# EAGLE board MM_MikroBUS_Carrier-Panel (EAGLE 9.4.2), part 1 of 2
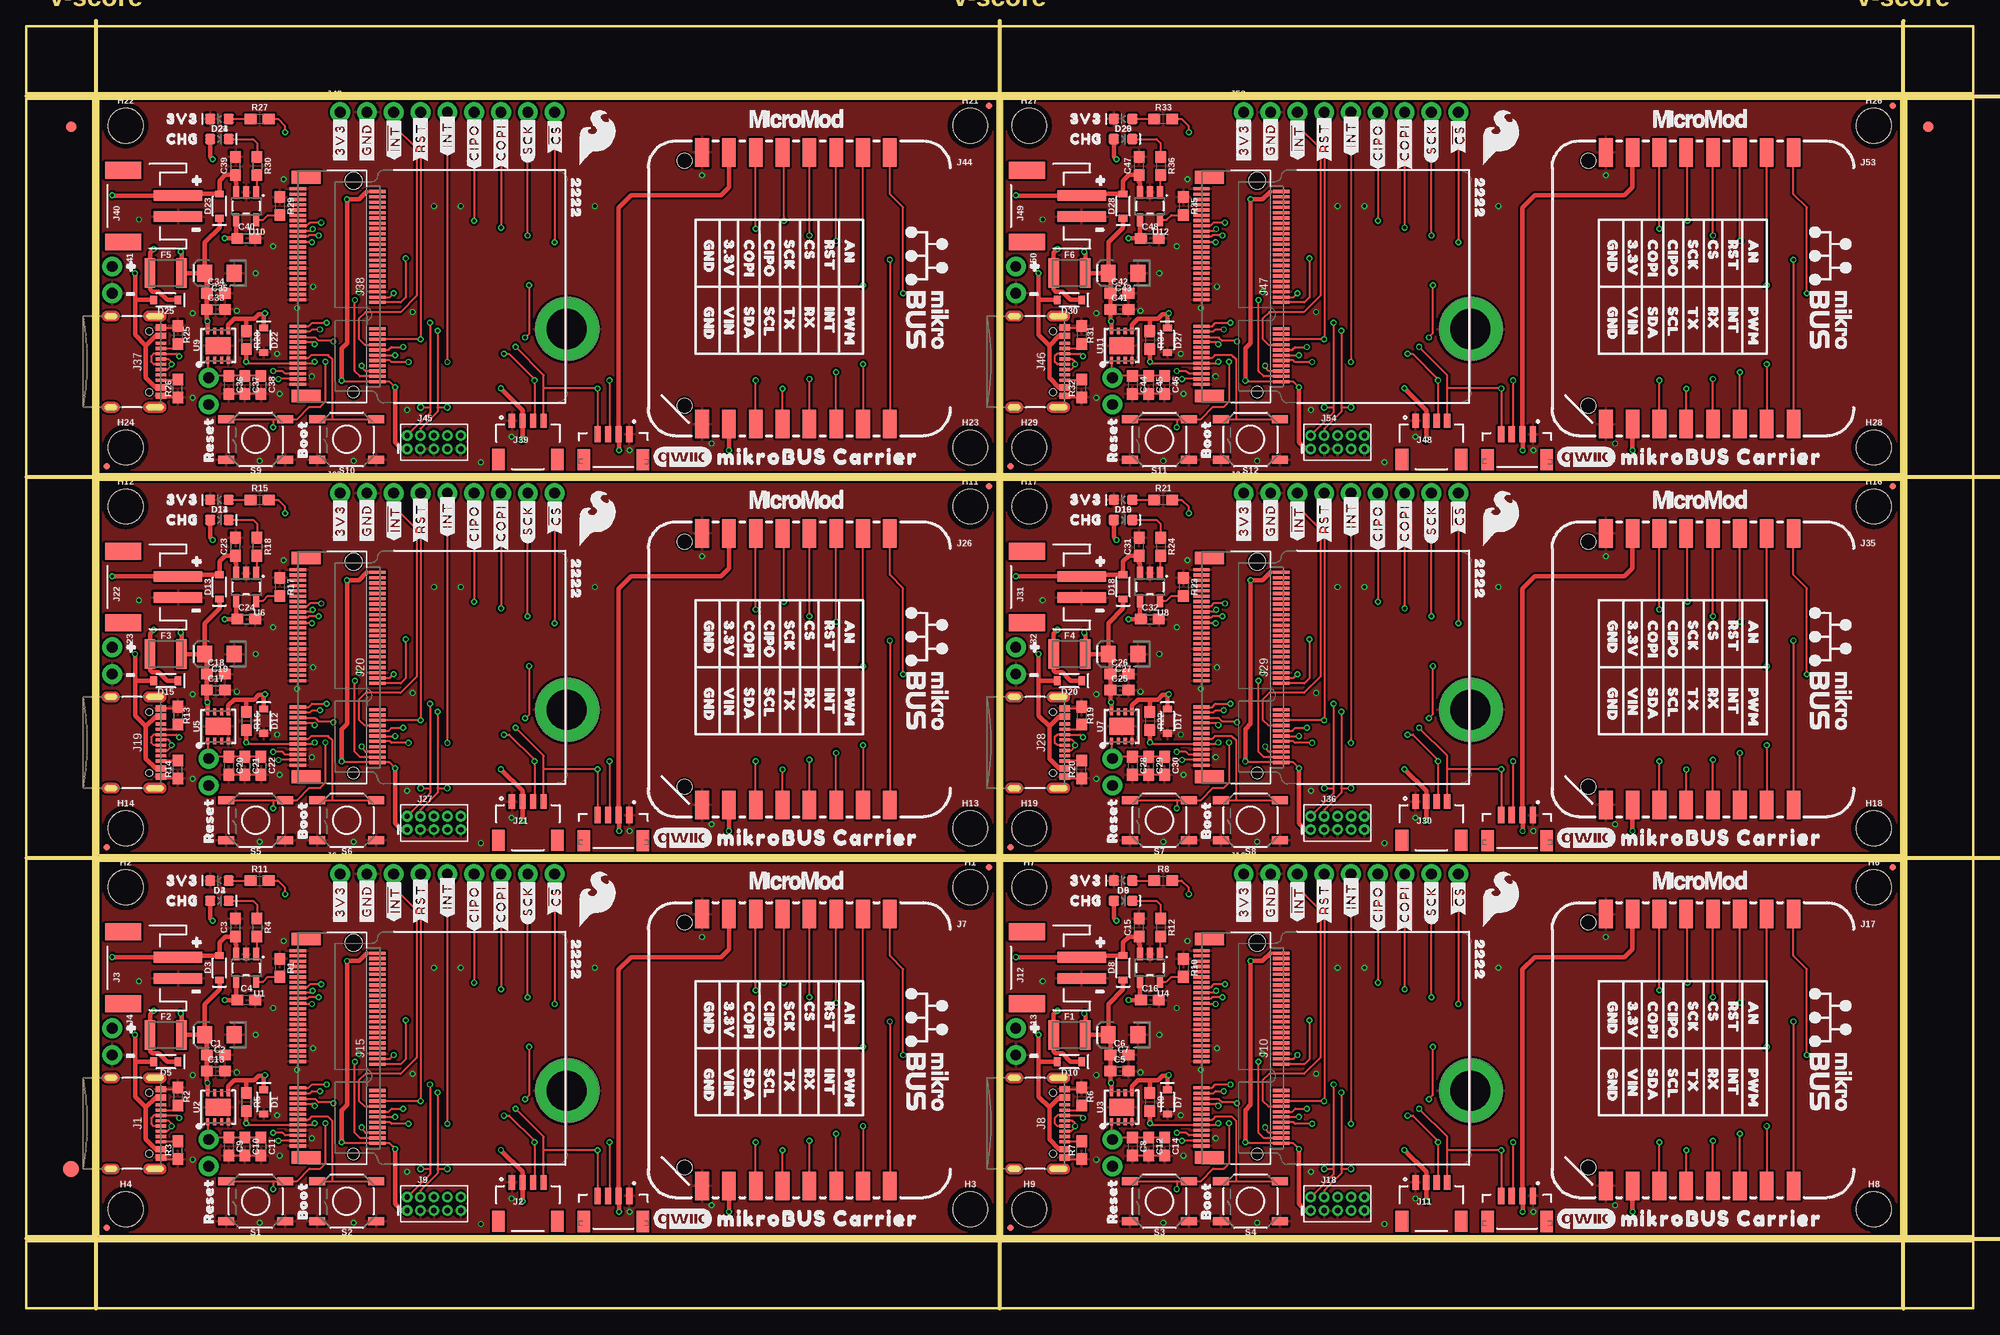
[diagram p0: board, top side]
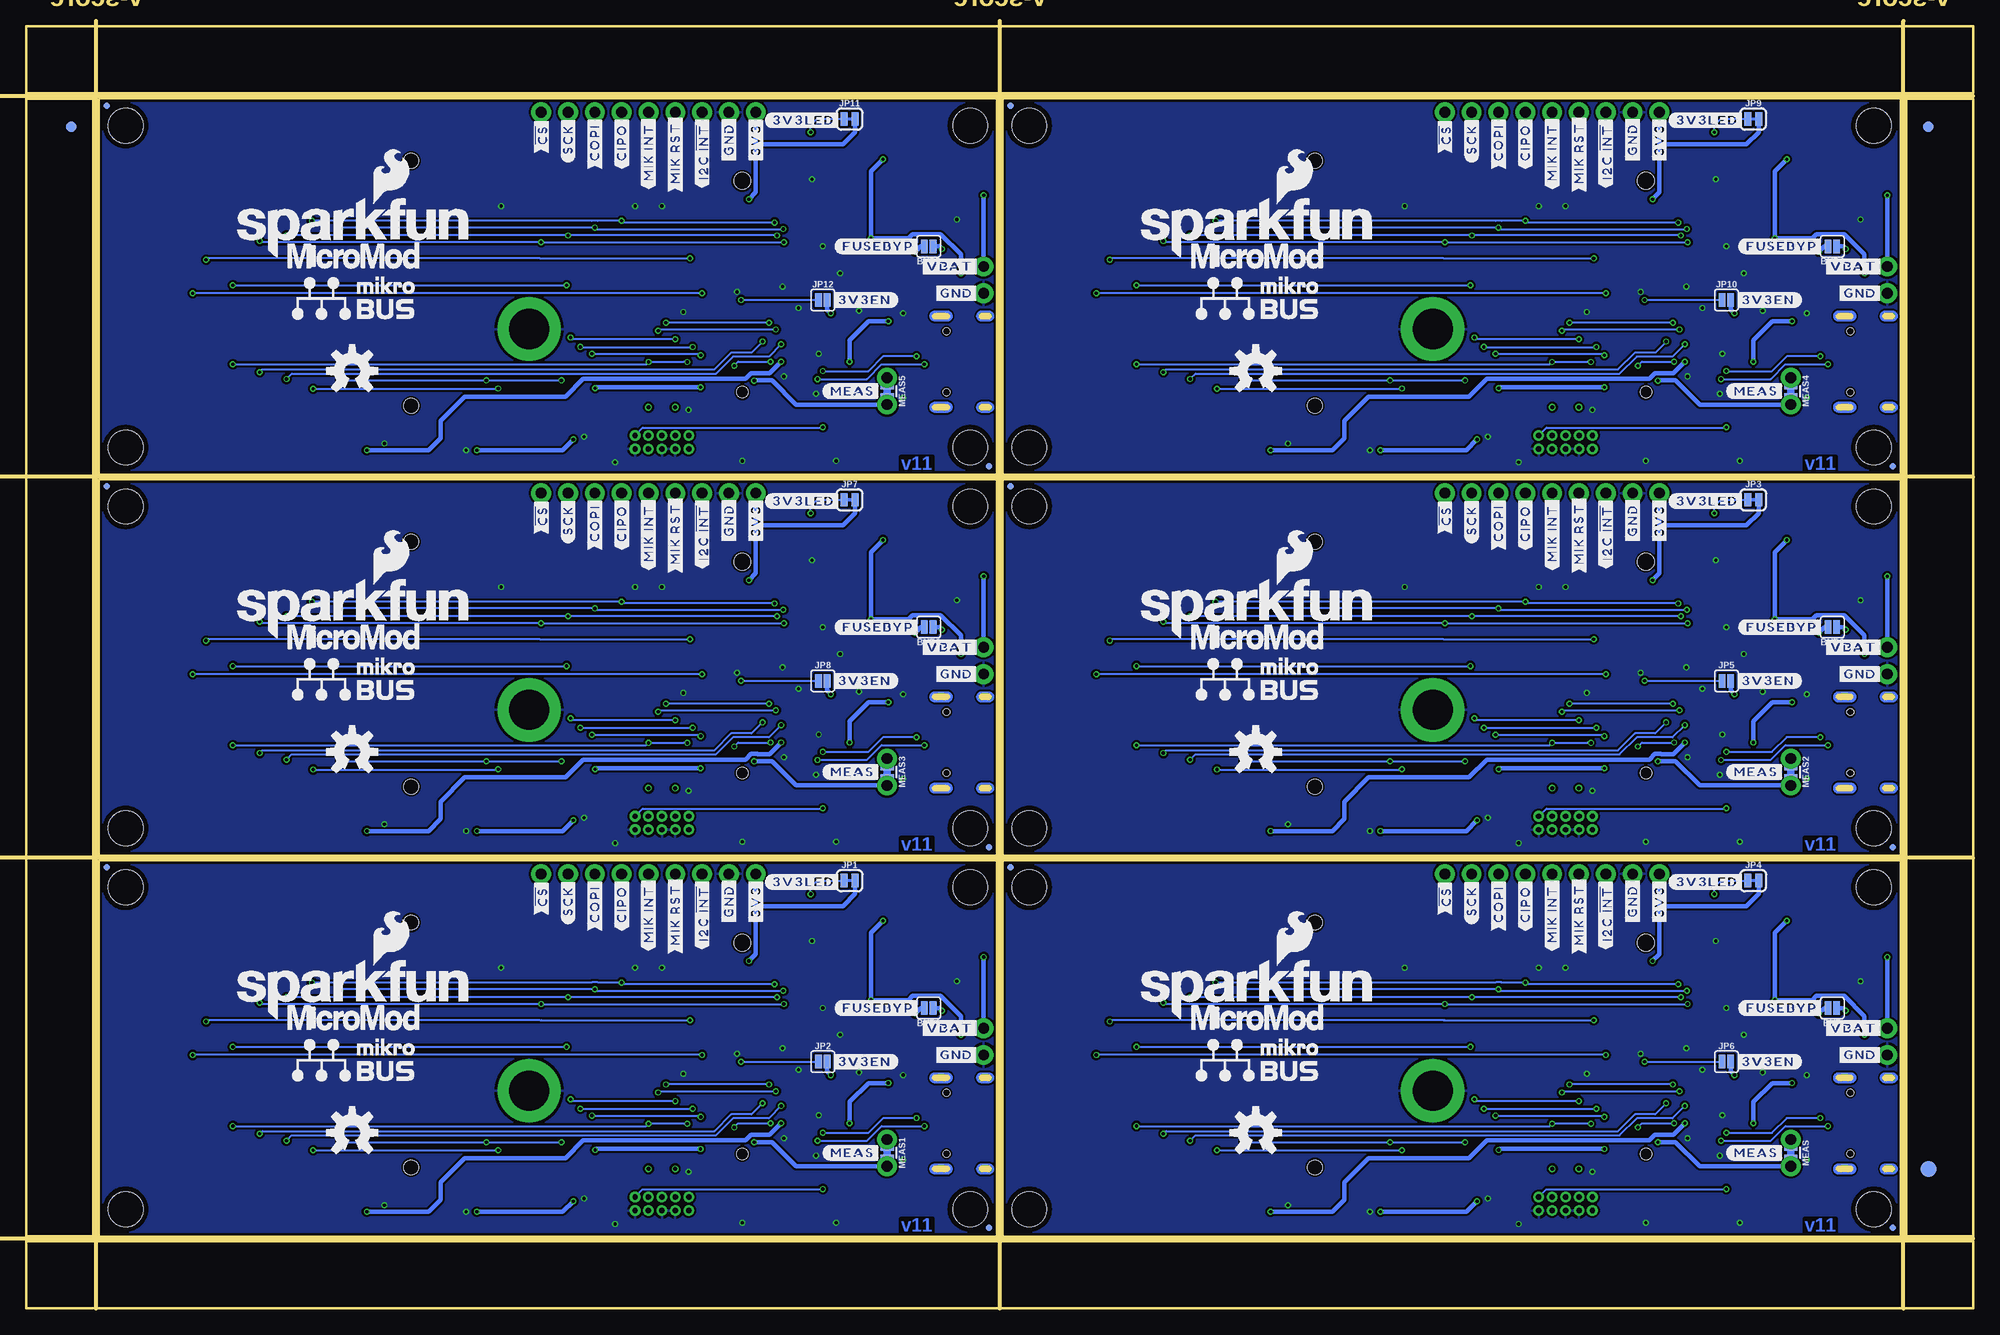
[diagram p1: board, bottom side, seen from below]

Size 184.4 x 121.41 mm. Coordinates in mm from the lower left corner, seen from the top.
Outline: 6.86,6.86 6.86,42.42 91.95,42.42 91.95,6.86 6.86,6.86
Outline: 92.46,6.86 92.46,42.42 177.55,42.42 177.55,6.86 92.46,6.86
Outline: 6.86,42.93 6.86,78.49 91.95,78.49 91.95,42.93 6.86,42.93
Outline: 92.46,42.93 92.46,78.49 177.55,78.49 177.55,42.93 92.46,42.93
Outline: 6.86,78.99 6.86,114.55 91.95,114.55 91.95,78.99 6.86,78.99
Outline: 92.46,78.99 92.46,114.55 177.55,114.55 177.55,78.99 92.46,78.99
Outline: 0,6.35 184.4,6.35 184.4,0 0,0 0,6.35
Outline: 178.05,114.55 184.4,114.55 184.4,6.86 178.05,6.86 178.05,114.55
Outline: 0,121.41 184.4,121.41 184.4,115.06 0,115.06 0,121.41
Outline: 0,114.55 6.35,114.55 6.35,6.86 0,6.86 0,114.55
Copper layers (1*16): Top 0.035mm / dielectric 1.5mm / Bottom 0.035mm
Design rules "MM_MikroBUS_Carrier": minimum track width 5mil, minimum drill 0.3mm, track to track 5mil, track to pad 5mil, pad to pad 5mil, via to via 5mil, smd to smd 5mil, copper to edge 7mil, drill to drill 7mil, minimum pad ring 5mil, minimum via ring 5mil, stop-mask expansion 2.5mil, vias tented up to drill 25mil, thermal gap 10mil
Net classes: 0 default: width 0 mm, drill 0 mm
Milling: 7 lines

## Footprints (pad centres in the part's own frame; a part is rotated, then mirrored left to right if it is on the bottom)
SMT-JUMPER_2_NO_SILK = smd 0.635 x 1.27: 1 -0.406,0; 2 0.406,0
0603 = smd 1.1 x 1: 1 -0.85,0; 2 0.85,0
EIA3216 = smd 1.4 x 1.6: + 1.4,0; - -1.4,0
SOD-323 = smd 0.63 x 0.83: A 1.15,0; C -1.15,0
LED-0603 = smd 1 x 1: A -0.877,0; C 0.877,0
FIDUCIAL-1X2 = smd 1 x 1: 1 0,0
FIDUCIAL-1.5X3 = smd 1.5 x 1.5: 1 0,0
1210 = smd 1 x 2.8: 1 -1.5,0; 2 1.5,0
FIDUCIAL-MICRO = smd 0.635 x 0.635: 1 0,0
STAND-OFF = hole 3.302: 0,0
STAND-OFF-REFLOW-M2.5 = drill 3.8 pad 6: 1 0,0
USB-C-16P-2LAYER-PADS = smd 0.3 x 1: A5 -1.25,-0.34; A6 -0.25,-0.34; A7 0.25,-0.34; A8 1.25,-0.34; B5 1.75,-0.34; B6 0.75,-0.34; B7 -0.75,-0.34; B8 -1.75,-0.34 | smd 0.6 x 1: GND -3.225,-0.34; GND2 3.225,-0.34; VBUS1 -2.45,-0.34; VBUS2 2.45,-0.34 | drill 0.4 pad 0.6 long: SHLD1 -4.318,-0.915; SHLD2 4.318,-0.915; SHLD3 -4.318,-5.095; SHLD4 4.318,-5.095 | hole 0.65: -2.89,-1.445; 2.89,-1.445
JST04_1MM_RA = smd 0.6 x 1.35: 1 -1.5,0; 2 -0.5,0; 3 0.5,0; 4 1.5,0 | smd 1.2 x 2: NC1 2.8,-3.675; NC2 -2.8,-3.675
JST-2-SMD = smd 1 x 4.6: 1 -1,-3.7; 2 1,-3.7 | smd 1.6 x 3.4: NC1 -3.4,1.5; NC2 3.4,1.5
1X02_NO_SILK = drill 1.016 pad 1.88: 1 0,0; 2 2.54,0
JST04_1MM_VERT = smd 0.6 x 1.55: 1 -1.478,0.775; 2 -0.478,0.775; 3 0.522,0.775; 4 1.522,0.775 | smd 1.2 x 2: NC1 -2.778,3.2; NC2 2.822,3.2
1X09_NO_SILK = drill 1.016 pad 1.88: 1 0,0; 2 2.54,0; 3 5.08,0; 4 7.62,0; 5 10.16,0; 6 12.7,0; 7 15.24,0; 8 17.78,0; 9 20.32,0
MIKROBUS_SMD_BLACK = smd 2.7 x 1.3: 1 -12.7,8.89; 2 -12.7,6.35; 3 -12.7,3.81; 4 -12.7,1.27; 5 -12.7,-1.27; 6 -12.7,-3.81; 7 -12.7,-6.35; 8 -12.7,-8.89; 9 13.02,-8.89; 10 13.02,-6.35; 11 13.02,-3.81; 12 13.02,-1.27; 13 13.02,1.27; 14 13.02,3.81; 15 13.02,6.35; 16 13.02,8.89 | hole 1.4: -11.914,-10.541; 11.286,-10.541
2X5-PTH-1.27MM = drill 0.508 pad 1: 1 -2.54,-0.635; 2 -2.54,0.635; 3 -1.27,-0.635; 4 -1.27,0.635; 5 0,-0.635; 6 0,0.635; 7 1.27,-0.635; 8 1.27,0.635; 9 2.54,-0.635; 10 2.54,0.635
M.2-CONNECTOR-E = smd 0.3 x 1.55: 1 9.25,-5.275; 2 9,2.275; 3 8.75,-5.275; 4 8.5,2.275; 5 8.25,-5.275; 6 8,2.275; 7 7.75,-5.275; 8 7.5,2.275; 9 7.25,-5.275; 10 7,2.275; 11 6.75,-5.275; 12 6.5,2.275; 13 6.25,-5.275; 14 6,2.275; 15 5.75,-5.275; 16 5.5,2.275; 17 5.25,-5.275; 18 5,2.275; 19 4.75,-5.275; 20 4.5,2.275; 21 4.25,-5.275; 22 4,2.275; 23 3.75,-5.275; 32 1.5,2.275; 33 1.25,-5.275; 34 1,2.275; 35 0.75,-5.275; 36 0.5,2.275; 37 0.25,-5.275; 38 0,2.275; 39 -0.25,-5.275; 40 -0.5,2.275; 41 -0.75,-5.275; 42 -1,2.275; 43 -1.25,-5.275; 44 -1.5,2.275; 45 -1.75,-5.275; 46 -2,2.275; 47 -2.25,-5.275; 48 -2.5,2.275; 49 -2.75,-5.275; 50 -3,2.275; 51 -3.25,-5.275; 52 -3.5,2.275; 53 -3.75,-5.275; 54 -4,2.275; 55 -4.25,-5.275; 56 -4.5,2.275; 57 -4.75,-5.275; 58 -5,2.275; 59 -5.25,-5.275; 60 -5.5,2.275; 61 -5.75,-5.275; 62 -6,2.275; 63 -6.25,-5.275; 64 -6.5,2.275; 65 -6.75,-5.275; 66 -7,2.275; 67 -7.25,-5.275; 68 -7.5,2.275; 69 -7.75,-5.275; 70 -8,2.275; 71 -8.25,-5.275; 72 -8.5,2.275; 73 -8.75,-5.275; 74 -9,2.275; 75 -9.25,-5.275 | smd 1.2 x 2.75: A1 10.35,-4.5; A2 -10.35,-4.5 | hole 1.1: 10,0 | hole 1.6: -10,0
SMT-JUMPER_2_NC_TRACE_SILK = smd 0.66 x 1.27: 1 -0.521,0; 2 0.521,0
COMBO-JUMPER_2_NC_TRACE = smd 0.635 x 1.27: 1 -0.508,0; 2 0.508,0 | drill 1.016 pad 1.88: 3 -1.27,0; 4 1.27,0
TACTILE_SWITCH_SMD_5.2MM = smd 1.524 x 0.762: 1 -2.794,1.905; 2 2.794,1.905; 3 -2.794,-1.905; 4 2.794,-1.905
TP_15TH = drill 0.381 pad 0.61: 1 0,0
SOT23-5 = smd 0.55 x 1.2: 1 -0.95,-1.3; 2 0,-1.3; 3 0.95,-1.3; 4 0.95,1.3; 5 -0.95,1.3
UDFN-8 = smd 0.3 x 0.65: 1 -0.975,-1.375; 2 -0.325,-1.375; 3 0.325,-1.375; 4 0.975,-1.375; 5 0.975,1.375; 6 0.325,1.375; 7 -0.325,1.375; 8 -0.975,1.375 | smd 2.35 x 1.6: EP 0,0

## Placement (x,y rotation side)
BYP  JUMPER-SMT_2_NO_SILK  [SMT-JUMPER_2_NO_SILK]  13.34,28.45 180 bottom
BYP1  JUMPER-SMT_2_NO_SILK  [SMT-JUMPER_2_NO_SILK]  98.93,28.45 180 bottom
BYP2  JUMPER-SMT_2_NO_SILK  [SMT-JUMPER_2_NO_SILK]  13.34,64.52 180 bottom
BYP3  JUMPER-SMT_2_NO_SILK  [SMT-JUMPER_2_NO_SILK]  98.93,64.52 180 bottom
BYP4  JUMPER-SMT_2_NO_SILK  [SMT-JUMPER_2_NO_SILK]  13.34,100.58 180 bottom
BYP5  JUMPER-SMT_2_NO_SILK  [SMT-JUMPER_2_NO_SILK]  98.93,100.58 180 bottom
C1  0.1uF  [0603]  17.95,24 0 top
C2  10uF  [EIA3216]  18.29,25.91 180 top
C3  4.7uF  [0603]  19.81,36.07 90 top
C4  4.7uF  [0603]  20.83,29.21 0 top
C5  0.22uF  [0603]  103.54,22.48 0 top
C6  0.1uF  [0603]  103.54,24 0 top
C7  10uF  [EIA3216]  103.89,25.91 180 top
C8  10uF  [0603]  104.78,15.33 270 top
C9  10uF  [0603]  19.18,15.33 270 top
C10  1.0uF  [0603]  20.7,15.33 270 top
C11  0.22uF  [0603]  22.23,15.33 270 top
C12  1.0uF  [0603]  106.3,15.33 270 top
C13  0.22uF  [0603]  17.95,22.48 0 top
C14  0.22uF  [0603]  107.82,15.33 270 top
C15  4.7uF  [0603]  105.41,36.07 90 top
C16  4.7uF  [0603]  106.43,29.21 0 top
C17  0.22uF  [0603]  17.95,58.55 0 top
C18  0.1uF  [0603]  17.95,60.07 0 top
C19  10uF  [EIA3216]  18.29,61.98 180 top
C20  10uF  [0603]  19.18,51.4 270 top
C21  1.0uF  [0603]  20.7,51.4 270 top
C22  0.22uF  [0603]  22.23,51.4 270 top
C23  4.7uF  [0603]  19.81,72.14 90 top
C24  4.7uF  [0603]  20.83,65.28 0 top
C25  0.22uF  [0603]  103.54,58.55 0 top
C26  0.1uF  [0603]  103.54,60.07 0 top
C27  10uF  [EIA3216]  103.89,61.98 180 top
C28  10uF  [0603]  104.78,51.4 270 top
C29  1.0uF  [0603]  106.3,51.4 270 top
C30  0.22uF  [0603]  107.82,51.4 270 top
C31  4.7uF  [0603]  105.41,72.14 90 top
C32  4.7uF  [0603]  106.43,65.28 0 top
C33  0.22uF  [0603]  17.95,94.62 0 top
C34  0.1uF  [0603]  17.95,96.14 0 top
C35  10uF  [EIA3216]  18.29,98.04 180 top
C36  10uF  [0603]  19.18,87.46 270 top
C37  1.0uF  [0603]  20.7,87.46 270 top
C38  0.22uF  [0603]  22.23,87.46 270 top
C39  4.7uF  [0603]  19.81,108.2 90 top
C40  4.7uF  [0603]  20.83,101.35 0 top
C41  0.22uF  [0603]  103.54,94.62 0 top
C42  0.1uF  [0603]  103.54,96.14 0 top
C43  10uF  [EIA3216]  103.89,98.04 180 top
C44  10uF  [0603]  104.78,87.46 270 top
C45  1.0uF  [0603]  106.3,87.46 270 top
C46  0.22uF  [0603]  107.82,87.46 270 top
C47  4.7uF  [0603]  105.41,108.2 90 top
C48  4.7uF  [0603]  106.43,101.35 0 top
D1  3.3V  [SOD-323]  22.48,19.56 270 top
D2  RED  [LED-0603]  18.29,40.51 180 top
D3  3A/10V/280mV  [SOD-323]  18.29,32.26 90 top
D4  Yellow  [LED-0603]  18.29,38.61 0 top
D5  3A/10V/280mV  [SOD-323]  13.21,23.37 180 top
D6  RED  [LED-0603]  103.89,40.51 180 top
D7  3.3V  [SOD-323]  108.08,19.56 270 top
D8  3A/10V/280mV  [SOD-323]  103.89,32.26 90 top
D9  Yellow  [LED-0603]  103.89,38.61 0 top
D10  3A/10V/280mV  [SOD-323]  98.81,23.37 180 top
D11  RED  [LED-0603]  18.29,76.58 180 top
D12  3.3V  [SOD-323]  22.48,55.63 270 top
D13  3A/10V/280mV  [SOD-323]  18.29,68.33 90 top
D14  Yellow  [LED-0603]  18.29,74.68 0 top
D15  3A/10V/280mV  [SOD-323]  13.21,59.44 180 top
D16  RED  [LED-0603]  103.89,76.58 180 top
D17  3.3V  [SOD-323]  108.08,55.63 270 top
D18  3A/10V/280mV  [SOD-323]  103.89,68.33 90 top
D19  Yellow  [LED-0603]  103.89,74.68 0 top
D20  3A/10V/280mV  [SOD-323]  98.81,59.44 180 top
D21  RED  [LED-0603]  18.29,112.65 180 top
D22  3.3V  [SOD-323]  22.48,91.69 270 top
D23  3A/10V/280mV  [SOD-323]  18.29,104.39 90 top
D24  Yellow  [LED-0603]  18.29,110.74 0 top
D25  3A/10V/280mV  [SOD-323]  13.21,95.5 180 top
D26  RED  [LED-0603]  103.89,112.65 180 top
D27  3.3V  [SOD-323]  108.08,91.69 270 top
D28  3A/10V/280mV  [SOD-323]  103.89,104.39 90 top
D29  Yellow  [LED-0603]  103.89,110.74 0 top
D30  3A/10V/280mV  [SOD-323]  98.81,95.5 180 top
E$1  [FIDUCIAL-1X2]  4.23,111.89 0 top
E$2  [FIDUCIAL-1X2]  4.23,111.89 0 bottom
E$3  [FIDUCIAL-1X2]  180.17,111.89 0 top
E$4  [FIDUCIAL-1X2]  180.17,111.89 0 bottom
E$5  [FIDUCIAL-1.5X3]  4.23,13.21 0 top
E$6  [FIDUCIAL-1.5X3]  4.23,13.21 0 bottom
F1  6V/2A  [1210]  98.81,25.91 0 top
F2  6V/2A  [1210]  13.21,25.91 0 top
F3  6V/2A  [1210]  13.21,61.98 0 top
F4  6V/2A  [1210]  98.81,61.98 0 top
F5  6V/2A  [1210]  13.21,98.04 0 top
F6  6V/2A  [1210]  98.81,98.04 0 top
FD1  FIDUCIALUFIDUCIAL  [FIDUCIAL-MICRO]  7.62,7.62 0 top
FD2  FIDUCIALUFIDUCIAL  [FIDUCIAL-MICRO]  91.19,41.78 0 top
FD3  FIDUCIALUFIDUCIAL  [FIDUCIAL-MICRO]  7.62,7.62 0 bottom
FD4  FIDUCIALUFIDUCIAL  [FIDUCIAL-MICRO]  91.19,41.78 0 bottom
FD5  FIDUCIALUFIDUCIAL  [FIDUCIAL-MICRO]  93.22,7.62 0 top
FD6  FIDUCIALUFIDUCIAL  [FIDUCIAL-MICRO]  176.78,41.78 0 top
FD7  FIDUCIALUFIDUCIAL  [FIDUCIAL-MICRO]  93.22,7.62 0 bottom
FD8  FIDUCIALUFIDUCIAL  [FIDUCIAL-MICRO]  176.78,41.78 0 bottom
FD9  FIDUCIALUFIDUCIAL  [FIDUCIAL-MICRO]  7.62,43.69 0 top
FD10  FIDUCIALUFIDUCIAL  [FIDUCIAL-MICRO]  91.19,77.85 0 top
FD11  FIDUCIALUFIDUCIAL  [FIDUCIAL-MICRO]  7.62,43.69 0 bottom
FD12  FIDUCIALUFIDUCIAL  [FIDUCIAL-MICRO]  91.19,77.85 0 bottom
FD13  FIDUCIALUFIDUCIAL  [FIDUCIAL-MICRO]  93.22,43.69 0 top
FD14  FIDUCIALUFIDUCIAL  [FIDUCIAL-MICRO]  176.78,77.85 0 top
FD15  FIDUCIALUFIDUCIAL  [FIDUCIAL-MICRO]  93.22,43.69 0 bottom
FD16  FIDUCIALUFIDUCIAL  [FIDUCIAL-MICRO]  176.78,77.85 0 bottom
FD17  FIDUCIALUFIDUCIAL  [FIDUCIAL-MICRO]  7.62,79.76 0 top
FD18  FIDUCIALUFIDUCIAL  [FIDUCIAL-MICRO]  91.19,113.92 0 top
FD19  FIDUCIALUFIDUCIAL  [FIDUCIAL-MICRO]  7.62,79.76 0 bottom
FD20  FIDUCIALUFIDUCIAL  [FIDUCIAL-MICRO]  91.19,113.92 0 bottom
FD21  FIDUCIALUFIDUCIAL  [FIDUCIAL-MICRO]  93.22,79.76 0 top
FD22  FIDUCIALUFIDUCIAL  [FIDUCIAL-MICRO]  176.78,113.92 0 top
FD23  FIDUCIALUFIDUCIAL  [FIDUCIAL-MICRO]  93.22,79.76 0 bottom
FD24  FIDUCIALUFIDUCIAL  [FIDUCIAL-MICRO]  176.78,113.92 0 bottom
H1  STAND-OFF  [STAND-OFF]  89.41,39.88 0 top
H2  STAND-OFF  [STAND-OFF]  9.4,39.88 0 top
H3  STAND-OFF  [STAND-OFF]  89.41,9.4 0 top
H4  STAND-OFF  [STAND-OFF]  9.4,9.4 0 top
H5  STAND-OFF-REFLOW-M2.5_2.5MM_TALL  [STAND-OFF-REFLOW-M2.5]  51.18,20.62 0 top
H6  STAND-OFF  [STAND-OFF]  175.01,39.88 0 top
H7  STAND-OFF  [STAND-OFF]  95,39.88 0 top
H8  STAND-OFF  [STAND-OFF]  175.01,9.4 0 top
H9  STAND-OFF  [STAND-OFF]  95,9.4 0 top
H10  STAND-OFF-REFLOW-M2.5_2.5MM_TALL  [STAND-OFF-REFLOW-M2.5]  136.78,20.62 0 top
H11  STAND-OFF  [STAND-OFF]  89.41,75.95 0 top
H12  STAND-OFF  [STAND-OFF]  9.4,75.95 0 top
H13  STAND-OFF  [STAND-OFF]  89.41,45.47 0 top
H14  STAND-OFF  [STAND-OFF]  9.4,45.47 0 top
H15  STAND-OFF-REFLOW-M2.5_2.5MM_TALL  [STAND-OFF-REFLOW-M2.5]  51.18,56.69 0 top
H16  STAND-OFF  [STAND-OFF]  175.01,75.95 0 top
H17  STAND-OFF  [STAND-OFF]  95,75.95 0 top
H18  STAND-OFF  [STAND-OFF]  175.01,45.47 0 top
H19  STAND-OFF  [STAND-OFF]  95,45.47 0 top
H20  STAND-OFF-REFLOW-M2.5_2.5MM_TALL  [STAND-OFF-REFLOW-M2.5]  136.78,56.69 0 top
H21  STAND-OFF  [STAND-OFF]  89.41,112.01 0 top
H22  STAND-OFF  [STAND-OFF]  9.4,112.01 0 top
H23  STAND-OFF  [STAND-OFF]  89.41,81.53 0 top
H24  STAND-OFF  [STAND-OFF]  9.4,81.53 0 top
H25  STAND-OFF-REFLOW-M2.5_2.5MM_TALL  [STAND-OFF-REFLOW-M2.5]  51.18,92.75 0 top
H26  STAND-OFF  [STAND-OFF]  175.01,112.01 0 top
H27  STAND-OFF  [STAND-OFF]  95,112.01 0 top
H28  STAND-OFF  [STAND-OFF]  175.01,81.53 0 top
H29  STAND-OFF  [STAND-OFF]  95,81.53 0 top
H30  STAND-OFF-REFLOW-M2.5_2.5MM_TALL  [STAND-OFF-REFLOW-M2.5]  136.78,92.75 0 top
J1  [USB-C-16P-2LAYER-PADS]  13.08,17.53 270 top
J2  QWIIC_RIGHT_ANGLE  [JST04_1MM_RA]  47.5,11.94 0 top
J3  [JST-2-SMD]  10.67,32.26 90 top
J4  [1X02_NO_SILK]  8.13,26.54 270 top
J5  Vertical Qwiic Connector  [JST04_1MM_VERT]  55.63,11.43 180 top
J6  [1X09_NO_SILK]  29.72,41.15 0 top
J7  MIKROBUS_SMD_BLACK1  [MIKROBUS_SMD_BLACK]  72.9,24.64 270 top
J8  [USB-C-16P-2LAYER-PADS]  98.68,17.53 270 top
J9  CORTEX_JTAG_DEBUG_MINIMUM_PTH  [2X5-PTH-1.27MM]  38.61,9.91 0 top
J10  MICROMOD-2222-C  [M.2-CONNECTOR-E]  116.59,24.64 270 top
J11  QWIIC_RIGHT_ANGLE  [JST04_1MM_RA]  133.1,11.94 0 top
J12  [JST-2-SMD]  96.27,32.26 90 top
J13  [1X02_NO_SILK]  93.73,26.54 270 top
J14  Vertical Qwiic Connector  [JST04_1MM_VERT]  141.22,11.43 180 top
J15  MICROMOD-2222-C  [M.2-CONNECTOR-E]  30.99,24.64 270 top
J16  [1X09_NO_SILK]  115.32,41.15 0 top
J17  MIKROBUS_SMD_BLACK1  [MIKROBUS_SMD_BLACK]  158.5,24.64 270 top
J18  CORTEX_JTAG_DEBUG_MINIMUM_PTH  [2X5-PTH-1.27MM]  124.21,9.91 0 top
J19  [USB-C-16P-2LAYER-PADS]  13.08,53.59 270 top
J20  MICROMOD-2222-C  [M.2-CONNECTOR-E]  30.99,60.71 270 top
J21  QWIIC_RIGHT_ANGLE  [JST04_1MM_RA]  47.5,48.01 0 top
J22  [JST-2-SMD]  10.67,68.33 90 top
J23  [1X02_NO_SILK]  8.13,62.61 270 top
J24  Vertical Qwiic Connector  [JST04_1MM_VERT]  55.63,47.5 180 top
J25  [1X09_NO_SILK]  29.72,77.22 0 top
J26  MIKROBUS_SMD_BLACK1  [MIKROBUS_SMD_BLACK]  72.9,60.71 270 top
J27  CORTEX_JTAG_DEBUG_MINIMUM_PTH  [2X5-PTH-1.27MM]  38.61,45.97 0 top
J28  [USB-C-16P-2LAYER-PADS]  98.68,53.59 270 top
J29  MICROMOD-2222-C  [M.2-CONNECTOR-E]  116.59,60.71 270 top
J30  QWIIC_RIGHT_ANGLE  [JST04_1MM_RA]  133.1,48.01 0 top
J31  [JST-2-SMD]  96.27,68.33 90 top
J32  [1X02_NO_SILK]  93.73,62.61 270 top
J33  Vertical Qwiic Connector  [JST04_1MM_VERT]  141.22,47.5 180 top
J34  [1X09_NO_SILK]  115.32,77.22 0 top
J35  MIKROBUS_SMD_BLACK1  [MIKROBUS_SMD_BLACK]  158.5,60.71 270 top
J36  CORTEX_JTAG_DEBUG_MINIMUM_PTH  [2X5-PTH-1.27MM]  124.21,45.97 0 top
J37  [USB-C-16P-2LAYER-PADS]  13.08,89.66 270 top
J38  MICROMOD-2222-C  [M.2-CONNECTOR-E]  30.99,96.77 270 top
J39  QWIIC_RIGHT_ANGLE  [JST04_1MM_RA]  47.5,84.07 0 top
J40  [JST-2-SMD]  10.67,104.39 90 top
J41  [1X02_NO_SILK]  8.13,98.68 270 top
J42  Vertical Qwiic Connector  [JST04_1MM_VERT]  55.63,83.57 180 top
J43  [1X09_NO_SILK]  29.72,113.28 0 top
J44  MIKROBUS_SMD_BLACK1  [MIKROBUS_SMD_BLACK]  72.9,96.77 270 top
J45  CORTEX_JTAG_DEBUG_MINIMUM_PTH  [2X5-PTH-1.27MM]  38.61,82.04 0 top
J46  [USB-C-16P-2LAYER-PADS]  98.68,89.66 270 top
J47  MICROMOD-2222-C  [M.2-CONNECTOR-E]  116.59,96.77 270 top
J48  QWIIC_RIGHT_ANGLE  [JST04_1MM_RA]  133.1,84.07 0 top
J49  [JST-2-SMD]  96.27,104.39 90 top
J50  [1X02_NO_SILK]  93.73,98.68 270 top
J51  Vertical Qwiic Connector  [JST04_1MM_VERT]  141.22,83.57 180 top
J52  [1X09_NO_SILK]  115.32,113.28 0 top
J53  MIKROBUS_SMD_BLACK1  [MIKROBUS_SMD_BLACK]  158.5,96.77 270 top
J54  CORTEX_JTAG_DEBUG_MINIMUM_PTH  [2X5-PTH-1.27MM]  124.21,82.04 0 top
JP1  3V3 LED  [SMT-JUMPER_2_NC_TRACE_SILK]  106.43,40.51 0 bottom
JP2  VE  [SMT-JUMPER_2_NO_SILK]  108.97,23.37 0 bottom
JP3  3V3 LED  [SMT-JUMPER_2_NC_TRACE_SILK]  20.83,76.58 0 bottom
JP4  3V3 LED  [SMT-JUMPER_2_NC_TRACE_SILK]  20.83,40.51 0 bottom
JP5  VE  [SMT-JUMPER_2_NO_SILK]  23.37,59.44 0 bottom
JP6  VE  [SMT-JUMPER_2_NO_SILK]  23.37,23.37 0 bottom
JP7  3V3 LED  [SMT-JUMPER_2_NC_TRACE_SILK]  106.43,76.58 0 bottom
JP8  VE  [SMT-JUMPER_2_NO_SILK]  108.97,59.44 0 bottom
JP9  3V3 LED  [SMT-JUMPER_2_NC_TRACE_SILK]  20.83,112.65 0 bottom
JP10  VE  [SMT-JUMPER_2_NO_SILK]  23.37,95.5 0 bottom
JP11  3V3 LED  [SMT-JUMPER_2_NC_TRACE_SILK]  106.43,112.65 0 bottom
JP12  VE  [SMT-JUMPER_2_NO_SILK]  108.97,95.5 0 bottom
LOGO1  SFE_LOGO_NAME_FLAME.2_INCH  [SFE_LOGO_NAME_FLAME_.2]  67.82,30.23 0 bottom
LOGO2  QWIIC_LOGO_CONNECTOR  [QWIIC_5.5MM]  62.17,8.51 0 top
LOGO3  OSHW-LOGOM  [OSHW-LOGO-M]  67.95,16.64 0 bottom
LOGO4  QWIIC_LOGO_CONNECTOR  [QWIIC_5.5MM]  147.76,8.51 0 top
LOGO5  OSHW-LOGOM  [OSHW-LOGO-M]  153.54,16.64 0 bottom
LOGO6  SFE_LOGO_NAME_FLAME.2_INCH  [SFE_LOGO_NAME_FLAME_.2]  153.42,30.23 0 bottom
LOGO7  QWIIC_LOGO_CONNECTOR  [QWIIC_5.5MM]  62.17,44.58 0 top
LOGO8  OSHW-LOGOM  [OSHW-LOGO-M]  67.95,52.7 0 bottom
LOGO9  SFE_LOGO_NAME_FLAME.2_INCH  [SFE_LOGO_NAME_FLAME_.2]  67.82,66.29 0 bottom
LOGO10  QWIIC_LOGO_CONNECTOR  [QWIIC_5.5MM]  147.76,44.58 0 top
LOGO11  OSHW-LOGOM  [OSHW-LOGO-M]  153.54,52.7 0 bottom
LOGO12  SFE_LOGO_NAME_FLAME.2_INCH  [SFE_LOGO_NAME_FLAME_.2]  153.42,66.29 0 bottom
LOGO13  QWIIC_LOGO_CONNECTOR  [QWIIC_5.5MM]  62.17,80.65 0 top
LOGO14  OSHW-LOGOM  [OSHW-LOGO-M]  67.95,88.77 0 bottom
LOGO15  SFE_LOGO_NAME_FLAME.2_INCH  [SFE_LOGO_NAME_FLAME_.2]  67.82,102.36 0 bottom
LOGO16  QWIIC_LOGO_CONNECTOR  [QWIIC_5.5MM]  147.76,80.65 0 top
LOGO17  OSHW-LOGOM  [OSHW-LOGO-M]  153.54,88.77 0 bottom
LOGO18  SFE_LOGO_NAME_FLAME.2_INCH  [SFE_LOGO_NAME_FLAME_.2]  153.42,102.36 0 bottom
MEAS  JUMPER-COMBO_2_NC_TRACE  [COMBO-JUMPER_2_NC_TRACE]  17.27,14.73 270 bottom
MEAS1  JUMPER-COMBO_2_NC_TRACE  [COMBO-JUMPER_2_NC_TRACE]  102.87,14.73 270 bottom
MEAS2  JUMPER-COMBO_2_NC_TRACE  [COMBO-JUMPER_2_NC_TRACE]  17.27,50.8 270 bottom
MEAS3  JUMPER-COMBO_2_NC_TRACE  [COMBO-JUMPER_2_NC_TRACE]  102.87,50.8 270 bottom
MEAS4  JUMPER-COMBO_2_NC_TRACE  [COMBO-JUMPER_2_NC_TRACE]  17.27,86.87 270 bottom
MEAS5  JUMPER-COMBO_2_NC_TRACE  [COMBO-JUMPER_2_NC_TRACE]  102.87,86.87 270 bottom
R1  2.2k  [0603]  24,32.26 270 top
R2  5.1k  [0603]  14.35,20.07 270 top
R3  5.1k  [0603]  14.35,14.99 90 top
R4  1k  [0603]  21.84,36.07 270 top
R5  100k  [0603]  20.83,19.56 270 top
R6  5.1k  [0603]  99.95,20.07 270 top
R7  5.1k  [0603]  99.95,14.99 90 top
R8  1k  [0603]  107.7,40.51 0 top
R9  100k  [0603]  106.43,19.56 270 top
R10  2.2k  [0603]  109.6,32.26 270 top
R11  1k  [0603]  22.1,40.51 0 top
R12  1k  [0603]  107.44,36.07 270 top
R13  5.1k  [0603]  14.35,56.13 270 top
R14  5.1k  [0603]  14.35,51.05 90 top
R15  1k  [0603]  22.1,76.58 0 top
R16  100k  [0603]  20.83,55.63 270 top
R17  2.2k  [0603]  24,68.33 270 top
R18  1k  [0603]  21.84,72.14 270 top
R19  5.1k  [0603]  99.95,56.13 270 top
R20  5.1k  [0603]  99.95,51.05 90 top
R21  1k  [0603]  107.7,76.58 0 top
R22  100k  [0603]  106.43,55.63 270 top
R23  2.2k  [0603]  109.6,68.33 270 top
R24  1k  [0603]  107.44,72.14 270 top
R25  5.1k  [0603]  14.35,92.2 270 top
R26  5.1k  [0603]  14.35,87.12 90 top
R27  1k  [0603]  22.1,112.65 0 top
R28  100k  [0603]  20.83,91.69 270 top
R29  2.2k  [0603]  24,104.39 270 top
R30  1k  [0603]  21.84,108.2 270 top
R31  5.1k  [0603]  99.95,92.2 270 top
R32  5.1k  [0603]  99.95,87.12 90 top
R33  1k  [0603]  107.7,112.65 0 top
R34  100k  [0603]  106.43,91.69 270 top
R35  2.2k  [0603]  109.6,104.39 270 top
R36  1k  [0603]  107.44,108.2 270 top
S1  Reset  [TACTILE_SWITCH_SMD_5.2MM]  21.72,10.16 180 top
S2  BOOT  [TACTILE_SWITCH_SMD_5.2MM]  30.35,10.16 180 top
S3  Reset  [TACTILE_SWITCH_SMD_5.2MM]  107.31,10.16 180 top
S4  BOOT  [TACTILE_SWITCH_SMD_5.2MM]  115.95,10.16 180 top
S5  Reset  [TACTILE_SWITCH_SMD_5.2MM]  21.72,46.23 180 top
S6  BOOT  [TACTILE_SWITCH_SMD_5.2MM]  30.35,46.23 180 top
S7  Reset  [TACTILE_SWITCH_SMD_5.2MM]  107.31,46.23 180 top
S8  BOOT  [TACTILE_SWITCH_SMD_5.2MM]  115.95,46.23 180 top
S9  Reset  [TACTILE_SWITCH_SMD_5.2MM]  21.72,82.3 180 top
S10  BOOT  [TACTILE_SWITCH_SMD_5.2MM]  30.35,82.3 180 top
S11  Reset  [TACTILE_SWITCH_SMD_5.2MM]  107.31,82.3 180 top
S12  BOOT  [TACTILE_SWITCH_SMD_5.2MM]  115.95,82.3 180 top
SWDCK  TEST-POINTTP_15TH_THRU  [TP_15TH]  39.88,13.21 0 top
SWDCK1  TEST-POINTTP_15TH_THRU  [TP_15TH]  125.48,13.21 0 top
SWDCK2  TEST-POINTTP_15TH_THRU  [TP_15TH]  39.88,49.28 0 top
SWDCK3  TEST-POINTTP_15TH_THRU  [TP_15TH]  125.48,49.28 0 top
SWDCK4  TEST-POINTTP_15TH_THRU  [TP_15TH]  39.88,85.34 0 top
SWDCK5  TEST-POINTTP_15TH_THRU  [TP_15TH]  125.48,85.34 0 top
SWDIO  TEST-POINTTP_15TH_THRU  [TP_15TH]  37.34,13.21 0 top
SWDIO1  TEST-POINTTP_15TH_THRU  [TP_15TH]  122.94,13.21 0 top
SWDIO2  TEST-POINTTP_15TH_THRU  [TP_15TH]  37.34,49.28 0 top
SWDIO3  TEST-POINTTP_15TH_THRU  [TP_15TH]  122.94,49.28 0 top
SWDIO4  TEST-POINTTP_15TH_THRU  [TP_15TH]  37.34,85.34 0 top
SWDIO5  TEST-POINTTP_15TH_THRU  [TP_15TH]  122.94,85.34 0 top
U1  MCP73831  [SOT23-5]  20.83,32.26 180 top
U2  AP7361C-33FGEUDFN-8  [UDFN-8]  18.16,19.05 0 top
U3  AP7361C-33FGEUDFN-8  [UDFN-8]  103.76,19.05 0 top
U4  MCP73831  [SOT23-5]  106.43,32.26 180 top
U5  AP7361C-33FGEUDFN-8  [UDFN-8]  18.16,55.12 0 top
U6  MCP73831  [SOT23-5]  20.83,68.33 180 top
U7  AP7361C-33FGEUDFN-8  [UDFN-8]  103.76,55.12 0 top
U8  MCP73831  [SOT23-5]  106.43,68.33 180 top
U9  AP7361C-33FGEUDFN-8  [UDFN-8]  18.16,91.19 0 top
U10  MCP73831  [SOT23-5]  20.83,104.39 180 top
U11  AP7361C-33FGEUDFN-8  [UDFN-8]  103.76,91.19 0 top
U12  MCP73831  [SOT23-5]  106.43,104.39 180 top
U$1  [#3V3LED#0]  28.83,40.39 0 bottom
U$2  [MICROMOD_LOGO_.35]  72.9,40.51 0 top
U$3  [3V30]  12.57,40.51 0 top
U$4  [CHG0]  12.57,38.61 0 top
U$5  [MIKROBUS_CARRIER0]  64.39,8.51 0 top
U$6  [#INT#0]  39.88,37.08 90 top
U$7  MIKROBUS_LOGO  [MIKROBUS_LOGO]  67.95,23.88 0 bottom
U$8  [#GND#0]  32.26,36.32 90 top
U$9  [#MEAS#0]  23.37,14.73 0 bottom
U$10  [#3V3#0]  29.72,36.32 90 top
U$11  [#0]  8.38,26.54 0 top
U$12  [#VBAT#0]  14.22,26.54 0 bottom
U$13  [#3V3#0]  29.72,36.32 90 bottom
U$14  [#GND#0]  32.26,36.32 90 bottom
U$15  [##INT##0]  34.8,36.7 90 top
U$16  [#MIK_INT#0]  39.88,33.91 90 bottom
U$17  [#RST#0]  37.34,36.58 90 top
U$18  [SFE_LOGO_FLAME_.2]  139.7,38.73 0 top
U$19  [#MIK_RST#0]  37.34,33.66 90 bottom
U$20  [#I2C_#INT##0]  34.8,34.04 90 bottom
U$21  [MICROMOD_LOGO_.5]  153.42,27.56 0 bottom
U$22  [#CIPO#0]  42.42,35.81 90 top
U$23  [#CIPO#0]  42.42,35.81 90 bottom
U$24  [#COPI#0]  44.96,35.81 90 top
U$25  [#COPI#0]  44.96,35.81 90 bottom
U$26  [#SCK#0]  47.5,36.45 90 top
U$27  [#SCK#0]  47.5,36.45 90 bottom
U$28  [##CS##0]  50.04,37.34 90 top
U$29  [##CS##0]  50.04,37.34 90 bottom
U$30  [RESET0]  17.27,7.37 90 top
U$31  [BOOT0]  26.16,7.75 90 top
U$32  [#0]  14.61,34.67 0 top
U$33  [#GND#0]  12.95,24 0 bottom
U$34  [22220]  52.07,35.56 270 top
U$35  [AN0]  77.98,29.72 270 top
U$36  [#0]  8,24.26 0 top
U$37  [#0]  14.22,30.35 0 top
U$38  [#FUSEBYP#0]  22.23,28.45 0 bottom
U$39  [#3V3EN#0]  22.61,23.37 0 bottom
U$40  [RST0]  76.07,29.72 270 top
U$41  [CS0]  74.17,29.72 270 top
U$42  [SCK0]  72.26,29.72 270 top
U$43  [CIPO0]  70.36,29.72 270 top
U$44  [SFE_LOGO_FLAME_.2]  54.1,38.73 0 top
U$45  [COPI0]  68.45,29.72 270 top
U$46  [3#3V0]  66.55,29.72 270 top
U$47  [GND0]  64.64,29.72 270 top
U$48  [GND0]  64.64,23.37 270 top
U$49  [PWM0]  77.98,23.37 270 top
U$50  [INT0]  76.07,23.37 270 top
U$51  [RX0]  74.17,23.37 270 top
U$52  [TX0]  72.26,23.37 270 top
U$53  [SCL0]  70.36,23.37 270 top
U$54  [SDA0]  68.45,23.37 270 top
U$55  [VIN0]  66.55,23.37 270 top
U$56  [CHG0]  98.17,38.61 0 top
U$57  [#MEAS#0]  108.97,14.73 0 bottom
U$58  [3V30]  98.17,40.51 0 top
U$59  [#GND#0]  117.86,36.32 90 top
U$60  [#GND#0]  117.86,36.32 90 bottom
U$61  [#CIPO#0]  128.02,35.81 90 top
U$62  [#CIPO#0]  128.02,35.81 90 bottom
U$63  [#COPI#0]  130.56,35.81 90 top
U$64  [#COPI#0]  130.56,35.81 90 bottom
U$65  [#SCK#0]  133.1,36.45 90 top
U$66  [#SCK#0]  133.1,36.45 90 bottom
U$67  [#VBAT#0]  99.82,26.54 0 bottom
U$68  [MICROMOD_LOGO_.5]  67.82,27.56 0 bottom
U$69  [#GND#0]  98.55,24 0 bottom
U$70  [#0]  93.98,26.54 0 top
U$71  [#0]  100.2,34.67 0 top
U$72  [#0]  93.6,24.26 0 top
U$73  [#0]  99.82,30.35 0 top
U$74  [RESET0]  102.87,7.37 90 top
U$75  [BOOT0]  111.76,7.75 90 top
U$76  [22220]  137.67,35.56 270 top
U$77  [##CS##0]  135.64,37.34 90 top
U$78  [##CS##0]  135.64,37.34 90 bottom
U$79  [##INT##0]  120.4,36.7 90 top
U$80  [MICROMOD_LOGO_.35]  158.5,40.51 0 top
U$81  [#3V3#0]  115.32,36.32 90 top
U$82  [#3V3#0]  115.32,36.32 90 bottom
U$83  [MIKROBUS_CARRIER0]  149.99,8.51 0 top
U$84  [AN0]  163.58,29.72 270 top
U$85  [RST0]  161.67,29.72 270 top
U$86  [CS0]  159.77,29.72 270 top
U$87  [SCK0]  157.86,29.72 270 top
U$88  [CIPO0]  155.96,29.72 270 top
U$89  [COPI0]  154.05,29.72 270 top
U$90  [3#3V0]  152.15,29.72 270 top
U$91  [GND0]  150.24,29.72 270 top
U$92  [GND0]  150.24,23.37 270 top
U$93  [PWM0]  163.58,23.37 270 top
U$94  [INT0]  161.67,23.37 270 top
U$95  [RX0]  159.77,23.37 270 top
U$96  [TX0]  157.86,23.37 270 top
U$97  [SCL0]  155.96,23.37 270 top
U$98  [SDA0]  154.05,23.37 270 top
U$99  [VIN0]  152.15,23.37 270 top
U$100  [#3V3LED#0]  114.43,40.39 0 bottom
U$101  MIKROBUS_LOGO  [MIKROBUS_LOGO]  153.54,23.88 0 bottom
U$102  [#FUSEBYP#0]  107.82,28.45 0 bottom
U$103  [#3V3EN#0]  108.2,23.37 0 bottom
U$104  [#INT#0]  125.48,37.08 90 top
U$105  [#RST#0]  122.94,36.58 90 top
U$106  [#I2C_#INT##0]  120.4,34.04 90 bottom
U$107  [#MIK_INT#0]  125.48,33.91 90 bottom
U$108  [#MIK_RST#0]  122.94,33.66 90 bottom
U$109  [SFE_LOGO_FLAME_.2]  54.1,74.8 0 top
U$110  [MICROMOD_LOGO_.5]  67.82,63.63 0 bottom
U$111  [CHG0]  12.57,74.68 0 top
U$112  [#MEAS#0]  23.37,50.8 0 bottom
U$113  [3V30]  12.57,76.58 0 top
U$114  [#GND#0]  32.26,72.39 90 top
U$115  [#GND#0]  32.26,72.39 90 bottom
U$116  [#CIPO#0]  42.42,71.88 90 top
U$117  [#CIPO#0]  42.42,71.88 90 bottom
U$118  [#COPI#0]  44.96,71.88 90 top
U$119  [#COPI#0]  44.96,71.88 90 bottom
U$120  [#SCK#0]  47.5,72.52 90 top
U$121  [#SCK#0]  47.5,72.52 90 bottom
U$122  [#VBAT#0]  14.22,62.61 0 bottom
U$123  [#GND#0]  12.95,60.07 0 bottom
U$124  [#0]  8.38,62.61 0 top
U$125  [#0]  14.61,70.74 0 top
U$126  [#0]  8,60.32 0 top
U$127  [#0]  14.22,66.42 0 top
U$128  [RESET0]  17.27,43.43 90 top
U$129  [BOOT0]  26.16,43.81 90 top
U$130  [22220]  52.07,71.63 270 top
U$131  [##CS##0]  50.04,73.41 90 top
U$132  [##CS##0]  50.04,73.41 90 bottom
U$133  [##INT##0]  34.8,72.77 90 top
U$134  [MICROMOD_LOGO_.35]  72.9,76.58 0 top
U$135  [#3V3#0]  29.72,72.39 90 top
U$136  [#3V3#0]  29.72,72.39 90 bottom
U$137  [MIKROBUS_CARRIER0]  64.39,44.58 0 top
U$138  [AN0]  77.98,65.79 270 top
U$139  [RST0]  76.07,65.79 270 top
U$140  [CS0]  74.17,65.79 270 top
U$141  [SCK0]  72.26,65.79 270 top
U$142  [CIPO0]  70.36,65.79 270 top
U$143  [COPI0]  68.45,65.79 270 top
U$144  [3#3V0]  66.55,65.79 270 top
U$145  [GND0]  64.64,65.79 270 top
U$146  [GND0]  64.64,59.44 270 top
U$147  [PWM0]  77.98,59.44 270 top
U$148  [INT0]  76.07,59.44 270 top
U$149  [RX0]  74.17,59.44 270 top
U$150  [TX0]  72.26,59.44 270 top
U$151  [SCL0]  70.36,59.44 270 top
U$152  [SDA0]  68.45,59.44 270 top
U$153  [VIN0]  66.55,59.44 270 top
U$154  [#3V3LED#0]  28.83,76.45 0 bottom
U$155  MIKROBUS_LOGO  [MIKROBUS_LOGO]  67.95,59.94 0 bottom
U$156  [#FUSEBYP#0]  22.23,64.52 0 bottom
U$157  [#3V3EN#0]  22.61,59.44 0 bottom
U$158  [#INT#0]  39.88,73.15 90 top
U$159  [#RST#0]  37.34,72.64 90 top
U$160  [#I2C_#INT##0]  34.8,70.1 90 bottom
U$161  [#MIK_INT#0]  39.88,69.98 90 bottom
U$162  [#MIK_RST#0]  37.34,69.72 90 bottom
U$163  [SFE_LOGO_FLAME_.2]  139.7,74.8 0 top
U$164  [MICROMOD_LOGO_.5]  153.42,63.63 0 bottom
U$165  [CHG0]  98.17,74.68 0 top
U$166  [#MEAS#0]  108.97,50.8 0 bottom
U$167  [3V30]  98.17,76.58 0 top
U$168  [#GND#0]  117.86,72.39 90 top
U$169  [#GND#0]  117.86,72.39 90 bottom
U$170  [#CIPO#0]  128.02,71.88 90 top
U$171  [#CIPO#0]  128.02,71.88 90 bottom
U$172  [#COPI#0]  130.56,71.88 90 top
U$173  [#COPI#0]  130.56,71.88 90 bottom
U$174  [#SCK#0]  133.1,72.52 90 top
U$175  [#SCK#0]  133.1,72.52 90 bottom
U$176  [#VBAT#0]  99.82,62.61 0 bottom
U$177  [#GND#0]  98.55,60.07 0 bottom
U$178  [#0]  93.98,62.61 0 top
U$179  [#0]  100.2,70.74 0 top
U$180  [#0]  93.6,60.32 0 top
U$181  [#0]  99.82,66.42 0 top
U$182  [RESET0]  102.87,43.43 90 top
U$183  [BOOT0]  111.76,43.81 90 top
U$184  [22220]  137.67,71.63 270 top
U$185  [##CS##0]  135.64,73.41 90 top
U$186  [##CS##0]  135.64,73.41 90 bottom
U$187  [##INT##0]  120.4,72.77 90 top
U$188  [MICROMOD_LOGO_.35]  158.5,76.58 0 top
U$189  [#3V3#0]  115.32,72.39 90 top
U$190  [#3V3#0]  115.32,72.39 90 bottom
U$191  [MIKROBUS_CARRIER0]  149.99,44.58 0 top
U$192  [AN0]  163.58,65.79 270 top
U$193  [RST0]  161.67,65.79 270 top
U$194  [CS0]  159.77,65.79 270 top
U$195  [SCK0]  157.86,65.79 270 top
U$196  [CIPO0]  155.96,65.79 270 top
U$197  [COPI0]  154.05,65.79 270 top
U$198  [3#3V0]  152.15,65.79 270 top
U$199  [GND0]  150.24,65.79 270 top
U$200  [GND0]  150.24,59.44 270 top
U$201  [PWM0]  163.58,59.44 270 top
U$202  [INT0]  161.67,59.44 270 top
U$203  [RX0]  159.77,59.44 270 top
U$204  [TX0]  157.86,59.44 270 top
U$205  [SCL0]  155.96,59.44 270 top
U$206  [SDA0]  154.05,59.44 270 top
U$207  [VIN0]  152.15,59.44 270 top
U$208  [#3V3LED#0]  114.43,76.45 0 bottom
U$209  MIKROBUS_LOGO  [MIKROBUS_LOGO]  153.54,59.94 0 bottom
U$210  [#FUSEBYP#0]  107.82,64.52 0 bottom
U$211  [#3V3EN#0]  108.2,59.44 0 bottom
U$212  [#INT#0]  125.48,73.15 90 top
U$213  [#RST#0]  122.94,72.64 90 top
U$214  [#I2C_#INT##0]  120.4,70.1 90 bottom
U$215  [#MIK_INT#0]  125.48,69.98 90 bottom
U$216  [#MIK_RST#0]  122.94,69.72 90 bottom
U$217  [SFE_LOGO_FLAME_.2]  54.1,110.87 0 top
U$218  [MICROMOD_LOGO_.5]  67.82,99.7 0 bottom
U$219  [CHG0]  12.57,110.74 0 top
U$220  [#MEAS#0]  23.37,86.87 0 bottom
U$221  [3V30]  12.57,112.65 0 top
U$222  [#GND#0]  32.26,108.46 90 top
U$223  [#GND#0]  32.26,108.46 90 bottom
U$224  [#CIPO#0]  42.42,107.95 90 top
U$225  [#CIPO#0]  42.42,107.95 90 bottom
U$226  [#COPI#0]  44.96,107.95 90 top
U$227  [#COPI#0]  44.96,107.95 90 bottom
U$228  [#SCK#0]  47.5,108.59 90 top
U$229  [#SCK#0]  47.5,108.59 90 bottom
U$230  [#VBAT#0]  14.22,98.68 0 bottom
U$231  [#GND#0]  12.95,96.14 0 bottom
U$232  [#0]  8.38,98.68 0 top
U$233  [#0]  14.61,106.81 0 top
U$234  [#0]  8,96.39 0 top
U$235  [#0]  14.22,102.49 0 top
U$236  [RESET0]  17.27,79.5 90 top
U$237  [BOOT0]  26.16,79.88 90 top
U$238  [22220]  52.07,107.7 270 top
U$239  [##CS##0]  50.04,109.47 90 top
U$240  [##CS##0]  50.04,109.47 90 bottom
U$241  [##INT##0]  34.8,108.84 90 top
U$242  [MICROMOD_LOGO_.35]  72.9,112.65 0 top
U$243  [#3V3#0]  29.72,108.46 90 top
U$244  [#3V3#0]  29.72,108.46 90 bottom
U$245  [MIKROBUS_CARRIER0]  64.39,80.65 0 top
U$246  [AN0]  77.98,101.85 270 top
U$247  [RST0]  76.07,101.85 270 top
U$248  [CS0]  74.17,101.85 270 top
U$249  [SCK0]  72.26,101.85 270 top
U$250  [CIPO0]  70.36,101.85 270 top
U$251  [COPI0]  68.45,101.85 270 top
U$252  [3#3V0]  66.55,101.85 270 top
U$253  [GND0]  64.64,101.85 270 top
U$254  [GND0]  64.64,95.5 270 top
U$255  [PWM0]  77.98,95.5 270 top
U$256  [INT0]  76.07,95.5 270 top
U$257  [RX0]  74.17,95.5 270 top
U$258  [TX0]  72.26,95.5 270 top
U$259  [SCL0]  70.36,95.5 270 top
U$260  [SDA0]  68.45,95.5 270 top
U$261  [VIN0]  66.55,95.5 270 top
U$262  [#3V3LED#0]  28.83,112.52 0 bottom
U$263  MIKROBUS_LOGO  [MIKROBUS_LOGO]  67.95,96.01 0 bottom
U$264  [#FUSEBYP#0]  22.23,100.58 0 bottom
U$265  [#3V3EN#0]  22.61,95.5 0 bottom
U$266  [#INT#0]  39.88,109.22 90 top
U$267  [#RST#0]  37.34,108.71 90 top
U$268  [#I2C_#INT##0]  34.8,106.17 90 bottom
U$269  [#MIK_INT#0]  39.88,106.05 90 bottom
U$270  [#MIK_RST#0]  37.34,105.79 90 bottom
U$271  [SFE_LOGO_FLAME_.2]  139.7,110.87 0 top
U$272  [MICROMOD_LOGO_.5]  153.42,99.7 0 bottom
U$273  [CHG0]  98.17,110.74 0 top
U$274  [#MEAS#0]  108.97,86.87 0 bottom
U$275  [3V30]  98.17,112.65 0 top
U$276  [#GND#0]  117.86,108.46 90 top
U$277  [#GND#0]  117.86,108.46 90 bottom
U$278  [#CIPO#0]  128.02,107.95 90 top
U$279  [#CIPO#0]  128.02,107.95 90 bottom
U$280  [#COPI#0]  130.56,107.95 90 top
U$281  [#COPI#0]  130.56,107.95 90 bottom
U$282  [#SCK#0]  133.1,108.59 90 top
U$283  [#SCK#0]  133.1,108.59 90 bottom
U$284  [#VBAT#0]  99.82,98.68 0 bottom
U$285  [#GND#0]  98.55,96.14 0 bottom
U$286  [#0]  93.98,98.68 0 top
U$287  [#0]  100.2,106.81 0 top
U$288  [#0]  93.6,96.39 0 top
U$289  [#0]  99.82,102.49 0 top
U$290  [RESET0]  102.87,79.5 90 top
U$291  [BOOT0]  111.76,79.88 90 top
U$292  [22220]  137.67,107.7 270 top
U$293  [##CS##0]  135.64,109.47 90 top
U$294  [##CS##0]  135.64,109.47 90 bottom
U$295  [##INT##0]  120.4,108.84 90 top
U$296  [MICROMOD_LOGO_.35]  158.5,112.65 0 top
U$297  [#3V3#0]  115.32,108.46 90 top
U$298  [#3V3#0]  115.32,108.46 90 bottom
U$299  [MIKROBUS_CARRIER0]  149.99,80.65 0 top
U$300  [AN0]  163.58,101.85 270 top
U$301  [RST0]  161.67,101.85 270 top
U$302  [CS0]  159.77,101.85 270 top
U$303  [SCK0]  157.86,101.85 270 top
U$304  [CIPO0]  155.96,101.85 270 top
U$305  [COPI0]  154.05,101.85 270 top
U$306  [3#3V0]  152.15,101.85 270 top
U$307  [GND0]  150.24,101.85 270 top
U$308  [GND0]  150.24,95.5 270 top
U$309  [PWM0]  163.58,95.5 270 top
U$310  [INT0]  161.67,95.5 270 top
U$311  [RX0]  159.77,95.5 270 top
U$312  [TX0]  157.86,95.5 270 top
U$313  [SCL0]  155.96,95.5 270 top
U$314  [SDA0]  154.05,95.5 270 top
U$315  [VIN0]  152.15,95.5 270 top
U$316  [#3V3LED#0]  114.43,112.52 0 bottom
U$317  MIKROBUS_LOGO  [MIKROBUS_LOGO]  153.54,96.01 0 bottom
U$318  [#FUSEBYP#0]  107.82,100.58 0 bottom
U$319  [#3V3EN#0]  108.2,95.5 0 bottom
U$320  [#INT#0]  125.48,109.22 90 top
U$321  [#RST#0]  122.94,108.71 90 top
U$322  [#I2C_#INT##0]  120.4,106.17 90 bottom
U$323  [#MIK_INT#0]  125.48,106.05 90 bottom
U$324  [#MIK_RST#0]  122.94,105.79 90 bottom

## Library data of the parts
BYP BYP1-BYP5 JP1-JP12 MEAS MEAS1-MEAS5 = SparkFun-Jumpers
C1 C6 C18 C26 C34 C42 = SparkFun-Capacitors; PROD_ID: CAP-00810
C2 C7 C19 C27 C35 C43 = SparkFun-Capacitors; PROD_ID: CAP-00811
C3 C4 C15 C16 C23 C24 C31 C32 C39 C40 C47 C48 = SparkFun-Capacitors; PROD_ID: CAP-14106
C5 C11 C13 C14 C17 C22 C25 C30 C33 C38 C41 C46 = SparkFun-Capacitors; PROD_ID: CAP-07822
C8 C9 C20 C28 C36 C44 = SparkFun-Capacitors; PROD_ID: CAP-11015
C10 C12 C21 C29 C37 C45 = SparkFun-Capacitors; PROD_ID: CAP-00868
D1 D7 D12 D17 D22 D27 = SparkFun-DiscreteSemi; PROD_ID: DIO-11284
D2 D6 D11 D16 D21 D26 = SparkFun-LED; PROD_ID: DIO-00819
D3 D5 D8 D10 D13 D15 D18 D20 D23 D25 D28 D30 = SparkFun-DiscreteSemi; PROD_ID: DIO-14072
D4 D9 D14 D19 D24 D29 = SparkFun-LED; PROD_ID: DIO-09003
E$1-E$4 FD1-FD24 LOGO1-LOGO18 U$18 U$44 U$109 U$163 U$217 U$271 = SparkFun-Aesthetics
E$5 E$6 = SparkFun-Retired
F1-F6 = SparkFun-Fuses; PROD_ID: RES-14313
H1-H4 H6-H9 H11-H14 H16-H19 H21-H24 H26-H29 = SparkFun-Hardware
H5 H10 H15 H20 H25 H30 = SparkFun-Hardware; PROD_ID: HW-14899
J1 J8 J19 J28 J37 J46 = SparkFun-Connectors; PROD_ID: CONN-14122
J2 J11 J21 J30 J39 J48 = SparkFun-Connectors; PROD_ID: CONN-13694
J3 J12 J22 J31 J40 J49 = SparkFun-Connectors; PROD_ID: CONN-11443; SF_ID: PRT-08612
J4 J6 J9 J13 J16 J18 J23 J25 J27 J32 J34 J36 J41 J43 J45 J50 J52 J54 SWDCK SWDCK1-SWDCK5 SWDIO SWDIO1-SWDIO5 = SparkFun-Connectors
J5 J14 J24 J33 J42 J51 = SparkFun-Connectors; PROD_ID: CONN-14483
J7 J17 J26 J35 J44 J53 = mikroBUS_SMD_BLACK; PROD_ID: CONN-16267
J10 J15 J20 J29 J38 J47 = SparkFun-MicroMod; PROD_ID: CONN-14877
R1 R10 R17 R23 R29 R35 = SparkFun-Resistors; PROD_ID: RES-08272
R2 R3 R6 R7 R13 R14 R19 R20 R25 R26 R31 R32 = SparkFun-Resistors; PROD_ID: RES-12083
R4 R8 R11 R12 R15 R18 R21 R24 R27 R30 R33 R36 = SparkFun-Resistors; PROD_ID: RES-07856
R5 R9 R16 R22 R28 R34 = SparkFun-Resistors; PROD_ID: RES-07828
S1-S12 = SparkFun-Switches; PROD_ID: SWCH-14139
U1 U4 U6 U8 U10 U12 = SparkFun-IC-Power; PROD_ID: IC-09995
U2 U3 U5 U7 U9 U11 = SparkFun-IC-Power; PROD_ID: VREG-14094
U$1 U$3-U$6 U$8-U$17 U$19 U$20 U$22-U$35 U$38-U$43 U$45-U$67 U$69-U$71 U$74-U$79 U$81-U$100 U$102-U$108 U$111-U$125 U$128-U$133 U$135-U$154 U$156-U$162 U$165-U$179 U$182-U$187 U$189-U$208 U$210-U$216 U$219-U$233 U$236-U$241 U$243-U$262 U$264-U$270 U$273-U$287 U$290-U$295 U$297-U$316 U$318-U$324 = output
U$2 U$21 U$68 U$80 U$110 U$134 U$164 U$188 U$218 U$242 U$272 U$296 = SparkFun-MicroMod
U$7 U$101 U$155 U$209 U$263 U$317 = mikroBUS_SMD_BLACK
U$36 U$37 U$72 U$73 U$126 U$127 U$180 U$181 U$234 U$235 U$288 U$289 = buzzard_labels (1)

## Nets
3.3V: J2.2 J5.2 J6.1 J7.7 J9.1 J15.2 J15.74 JP4.2 MEAS.2 MEAS.4
3.3V1: J10.2 J10.74 J11.2 J14.2 J16.1 J17.7 J18.1 JP1.2 MEAS1.2 MEAS1.4
3.3V2: J20.2 J20.74 J21.2 J24.2 J25.1 J26.7 J27.1 JP3.2 MEAS2.2 MEAS2.4
3.3V3: J29.2 J29.74 J30.2 J33.2 J34.1 J35.7 J36.1 JP7.2 MEAS3.2 MEAS3.4
3.3V4: J38.2 J38.74 J39.2 J42.2 J43.1 J44.7 J45.1 JP9.2 MEAS4.2 MEAS4.4
3.3V5: J47.2 J47.74 J48.2 J51.2 J52.1 J53.7 J54.1 JP11.2 MEAS5.2 MEAS5.4
3.3V_EN: J15.4 JP6.1
3.3V_EN1: J10.4 JP2.1
3.3V_EN2: J20.4 JP5.1
3.3V_EN3: J29.4 JP8.1
3.3V_EN4: J38.4 JP10.1
3.3V_EN5: J47.4 JP12.1
!BOOT!: J15.11 S2.3 S2.4
!BOOT!1: J10.11 S4.3 S4.4
!BOOT!2: J20.11 S6.3 S6.4
!BOOT!3: J29.11 S8.3 S8.4
!BOOT!4: J38.11 S10.3 S10.4
!BOOT!5: J47.11 S12.3 S12.4
!RESET!: J9.10 J15.6 S1.3 S1.4
!RESET!1: J10.6 J18.10 S3.3 S3.4
!RESET!2: J20.6 J27.10 S5.3 S5.4
!RESET!3: J29.6 J36.10 S7.3 S7.4
!RESET!4: J38.6 J45.10 S9.3 S9.4
!RESET!5: J47.6 J54.10 S11.3 S11.4
AN: J7.1 J15.34
AN1: J10.34 J17.1
AN2: J20.34 J26.1
AN3: J29.34 J35.1
AN4: J38.34 J44.1
AN5: J47.34 J53.1
GND: C1.2 C2.- C3.2 C4.2 C9.2 C10.2 C11.2 C13.2 D1.A D2.C H5.1 J1.GND J1.GND2 J2.1 J3.1 J4.2 J5.1 J6.2 J7.8 J7.9 J9.3 J9.5 J9.9 J15.1 J15.7 J15.33 J15.36 J15.39 J15.45 J15.75 R1.1 R2.1 R3.1 S1.1 S1.2 S2.1 S2.2 U1.2 U2.4 U2.EP
GND1: C5.2 C6.2 C7.- C8.2 C12.2 C14.2 C15.2 C16.2 D6.C D7.A H10.1 J8.GND J8.GND2 J10.1 J10.7 J10.33 J10.36 J10.39 J10.45 J10.75 J11.1 J12.1 J13.2 J14.1 J16.2 J17.8 J17.9 J18.3 J18.5 J18.9 R6.1 R7.1 R10.1 S3.1 S3.2 S4.1 S4.2 U3.4 U3.EP U4.2
GND2: C17.2 C18.2 C19.- C20.2 C21.2 C22.2 C23.2 C24.2 D11.C D12.A H15.1 J19.GND J19.GND2 J20.1 J20.7 J20.33 J20.36 J20.39 J20.45 J20.75 J21.1 J22.1 J23.2 J24.1 J25.2 J26.8 J26.9 J27.3 J27.5 J27.9 R13.1 R14.1 R17.1 S5.1 S5.2 S6.1 S6.2 U5.4 U5.EP U6.2
GND3: C25.2 C26.2 C27.- C28.2 C29.2 C30.2 C31.2 C32.2 D16.C D17.A H20.1 J28.GND J28.GND2 J29.1 J29.7 J29.33 J29.36 J29.39 J29.45 J29.75 J30.1 J31.1 J32.2 J33.1 J34.2 J35.8 J35.9 J36.3 J36.5 J36.9 R19.1 R20.1 R23.1 S7.1 S7.2 S8.1 S8.2 U7.4 U7.EP U8.2
GND4: C33.2 C34.2 C35.- C36.2 C37.2 C38.2 C39.2 C40.2 D21.C D22.A H25.1 J37.GND J37.GND2 J38.1 J38.7 J38.33 J38.36 J38.39 J38.45 J38.75 J39.1 J40.1 J41.2 J42.1 J43.2 J44.8 J44.9 J45.3 J45.5 J45.9 R25.1 R26.1 R29.1 S9.1 S9.2 S10.1 S10.2 U9.4 U9.EP U10.2
GND5: C41.2 C42.2 C43.- C44.2 C45.2 C46.2 C47.2 C48.2 D26.C D27.A H30.1 J46.GND J46.GND2 J47.1 J47.7 J47.33 J47.36 J47.39 J47.45 J47.75 J48.1 J49.1 J50.2 J51.1 J52.2 J53.8 J53.9 J54.3 J54.5 J54.9 R31.1 R32.1 R35.1 S11.1 S11.2 S12.1 S12.2 U11.4 U11.EP U12.2
I2C_!INT!: J6.3 J15.16
I2C_!INT!1: J10.16 J16.3
I2C_!INT!2: J20.16 J25.3
I2C_!INT!3: J29.16 J34.3
I2C_!INT!4: J38.16 J43.3
I2C_!INT!5: J47.16 J52.3
MIK_INT: J6.5 J7.15 J15.10
MIK_INT1: J10.10 J16.5 J17.15
MIK_INT2: J20.10 J25.5 J26.15
MIK_INT3: J29.10 J34.5 J35.15
MIK_INT4: J38.10 J43.5 J44.15
MIK_INT5: J47.10 J52.5 J53.15
MIK_RST: J6.4 J7.2 J15.18
MIK_RST1: J10.18 J16.4 J17.2
MIK_RST2: J20.18 J25.4 J26.2
MIK_RST3: J29.18 J34.4 J35.2
MIK_RST4: J38.18 J43.4 J44.2
MIK_RST5: J47.18 J52.4 J53.2
N$1: C9.1 C10.1 C11.1 MEAS.1 MEAS.3 U2.1
N$2: R1.2 U1.5
N$3: D4.C R4.1
N$4: JP4.1 R11.2
N$5: J8.A5 R6.2
N$6: D2.A R11.1
N$7: J8.B5 R7.2
N$8: R4.2 U1.1
N$9: JP1.1 R8.2
N$10: J1.A5 R2.2
N$11: J1.B5 R3.2
N$12: D6.A R8.1
N$13: C8.1 C12.1 C14.1 MEAS1.1 MEAS1.3 U3.1
N$14: R10.2 U4.5
N$15: D9.C R12.1
N$16: R12.2 U4.1
N$17: J19.A5 R13.2
N$18: J19.B5 R14.2
N$19: JP3.1 R15.2
N$20: D11.A R15.1
N$21: C20.1 C21.1 C22.1 MEAS2.1 MEAS2.3 U5.1
N$22: R17.2 U6.5
N$23: D14.C R18.1
N$24: R18.2 U6.1
N$25: J28.A5 R19.2
N$26: J28.B5 R20.2
N$27: JP7.1 R21.2
N$28: D16.A R21.1
N$29: C28.1 C29.1 C30.1 MEAS3.1 MEAS3.3 U7.1
N$30: R23.2 U8.5
N$31: D19.C R24.1
N$32: R24.2 U8.1
N$33: J37.A5 R25.2
N$34: J37.B5 R26.2
N$35: JP9.1 R27.2
N$36: D21.A R27.1
N$37: C36.1 C37.1 C38.1 MEAS4.1 MEAS4.3 U9.1
N$38: R29.2 U10.5
N$39: D24.C R30.1
N$40: R30.2 U10.1
N$41: J46.A5 R31.2
N$42: J46.B5 R32.2
N$43: JP11.1 R33.2
N$44: D26.A R33.1
N$45: C44.1 C45.1 C46.1 MEAS5.1 MEAS5.3 U11.1
N$46: R35.2 U12.5
N$47: D29.C R36.1
N$48: R36.2 U12.1
PWM: J7.16 J15.32
PWM1: J10.32 J17.16
PWM2: J20.32 J26.16
PWM3: J29.32 J35.16
PWM4: J38.32 J44.16
PWM5: J47.32 J53.16
RX: J7.14 J15.19
RX1: J10.19 J17.14
RX2: J20.19 J26.14
RX3: J29.19 J35.14
RX4: J38.19 J44.14
RX5: J47.19 J53.14
SCL: J2.4 J5.4 J7.12 J15.14
SCL1: J10.14 J11.4 J14.4 J17.12
SCL2: J20.14 J21.4 J24.4 J26.12
SCL3: J29.14 J30.4 J33.4 J35.12
SCL4: J38.14 J39.4 J42.4 J44.12
SCL5: J47.14 J48.4 J51.4 J53.12
SDA: J2.3 J5.3 J7.11 J15.12
SDA1: J10.12 J11.3 J14.3 J17.11
SDA2: J20.12 J21.3 J24.3 J26.11
SDA3: J29.12 J30.3 J33.3 J35.11
SDA4: J38.12 J39.3 J42.3 J44.11
SDA5: J47.12 J48.3 J51.3 J53.11
SPI_!CS!: J6.9 J7.3 J15.55
SPI_!CS!1: J10.55 J16.9 J17.3
SPI_!CS!2: J20.55 J25.9 J26.3
SPI_!CS!3: J29.55 J34.9 J35.3
SPI_!CS!4: J38.55 J43.9 J44.3
SPI_!CS!5: J47.55 J52.9 J53.3
SPI_CIPO: J6.6 J7.5 J15.61
SPI_CIPO1: J10.61 J16.6 J17.5
SPI_CIPO2: J20.61 J25.6 J26.5
SPI_CIPO3: J29.61 J34.6 J35.5
SPI_CIPO4: J38.61 J43.6 J44.5
SPI_CIPO5: J47.61 J52.6 J53.5
SPI_COPI: J6.7 J7.6 J15.59
SPI_COPI1: J10.59 J16.7 J17.6
SPI_COPI2: J20.59 J25.7 J26.6
SPI_COPI3: J29.59 J34.7 J35.6
SPI_COPI4: J38.59 J43.7 J44.6
SPI_COPI5: J47.59 J52.7 J53.6
SPI_SCK: J6.8 J7.4 J15.57
SPI_SCK1: J10.57 J16.8 J17.4
SPI_SCK2: J20.57 J25.8 J26.4
SPI_SCK3: J29.57 J34.8 J35.4
SPI_SCK4: J38.57 J43.8 J44.4
SPI_SCK5: J47.57 J52.8 J53.4
SWDCK: J9.4 J15.21 SWDCK.1
SWDCK1: J10.21 J18.4 SWDCK1.1
SWDCK2: J20.21 J27.4 SWDCK2.1
SWDCK3: J29.21 J36.4 SWDCK3.1
SWDCK4: J38.21 J45.4 SWDCK4.1
SWDCK5: J47.21 J54.4 SWDCK5.1
SWDIO: J9.2 J15.23 SWDIO.1
SWDIO1: J10.23 J18.2 SWDIO1.1
SWDIO2: J20.23 J27.2 SWDIO2.1
SWDIO3: J29.23 J36.2 SWDIO3.1
SWDIO4: J38.23 J45.2 SWDIO4.1
SWDIO5: J47.23 J54.2 SWDIO5.1
TX: J7.13 J15.17
TX1: J10.17 J17.13
TX2: J20.17 J26.13
TX3: J29.17 J35.13
TX4: J38.17 J44.13
TX5: J47.17 J53.13
USB_D+: J1.A6 J1.B6 J15.3
USB_D+1: J8.A6 J8.B6 J10.3
USB_D+2: J19.A6 J19.B6 J20.3
USB_D+3: J28.A6 J28.B6 J29.3
USB_D+4: J37.A6 J37.B6 J38.3
USB_D+5: J46.A6 J46.B6 J47.3
USB_D-: J1.A7 J1.B7 J15.5
USB_D-1: J8.A7 J8.B7 J10.5
USB_D-2: J19.A7 J19.B7 J20.5
USB_D-3: J28.A7 J28.B7 J29.5
USB_D-4: J37.A7 J37.B7 J38.5
USB_D-5: J46.A7 J46.B7 J47.5
V_BATT: C3.1 D3.A J3.2 J4.1 U1.3
V_BATT1: C15.1 D8.A J12.2 J13.1 U4.3
V_BATT2: C23.1 D13.A J22.2 J23.1 U6.3
V_BATT3: C31.1 D18.A J31.2 J32.1 U8.3
V_BATT4: C39.1 D23.A J40.2 J41.1 U10.3
V_BATT5: C47.1 D28.A J49.2 J50.1 U12.3
V_USB: C4.1 D4.A D5.A J1.VBUS1 J1.VBUS2 U1.4
V_USB1: C16.1 D9.A D10.A J8.VBUS1 J8.VBUS2 U4.4
V_USB2: C24.1 D14.A D15.A J19.VBUS1 J19.VBUS2 U6.4
V_USB3: C32.1 D19.A D20.A J28.VBUS1 J28.VBUS2 U8.4
V_USB4: C40.1 D24.A D25.A J37.VBUS1 J37.VBUS2 U10.4
V_USB5: C48.1 D29.A D30.A J46.VBUS1 J46.VBUS2 U12.4
V_USB_1: BYP1.1 D10.C F1.1
V_USB_2: BYP.1 D5.C F2.1
V_USB_3: BYP2.1 D15.C F3.1
V_USB_4: BYP3.1 D20.C F4.1
V_USB_5: BYP4.1 D25.C F5.1
V_USB_6: BYP5.1 D30.C F6.1
VIN: BYP.2 C1.1 C2.+ C13.1 D3.C F2.2 J7.10 J15.9 R5.2 U2.8
VIN1: BYP1.2 C5.1 C6.1 C7.+ D8.C F1.2 J10.9 J17.10 R9.2 U3.8
VIN2: BYP2.2 C17.1 C18.1 C19.+ D13.C F3.2 J20.9 J26.10 R16.2 U5.8
VIN3: BYP3.2 C25.1 C26.1 C27.+ D18.C F4.2 J29.9 J35.10 R22.2 U7.8
VIN4: BYP4.2 C33.1 C34.1 C35.+ D23.C F5.2 J38.9 J44.10 R28.2 U9.8
VIN5: BYP5.2 C41.1 C42.1 C43.+ D28.C F6.2 J47.9 J53.10 R34.2 U11.8
VREG_EN: D1.C JP6.2 R5.1 U2.5
VREG_EN1: D7.C JP2.2 R9.1 U3.5
VREG_EN2: D12.C JP5.2 R16.1 U5.5
VREG_EN3: D17.C JP8.2 R22.1 U7.5
VREG_EN4: D22.C JP10.2 R28.1 U9.5
VREG_EN5: D27.C JP12.2 R34.1 U11.5